# Altium PCB SerialBoard (complex).PcbDoc
Units mil, origin at the board's own origin, x right, y up, seen from the top; angles counter-clockwise.
Board outline 2500 x 1750 mil, 2 copper layers (Top Layer, Bottom Layer); 37 components, 48 nets, 225 pads, 36 vias.
Unrouted connection lines stored in the file: 39.
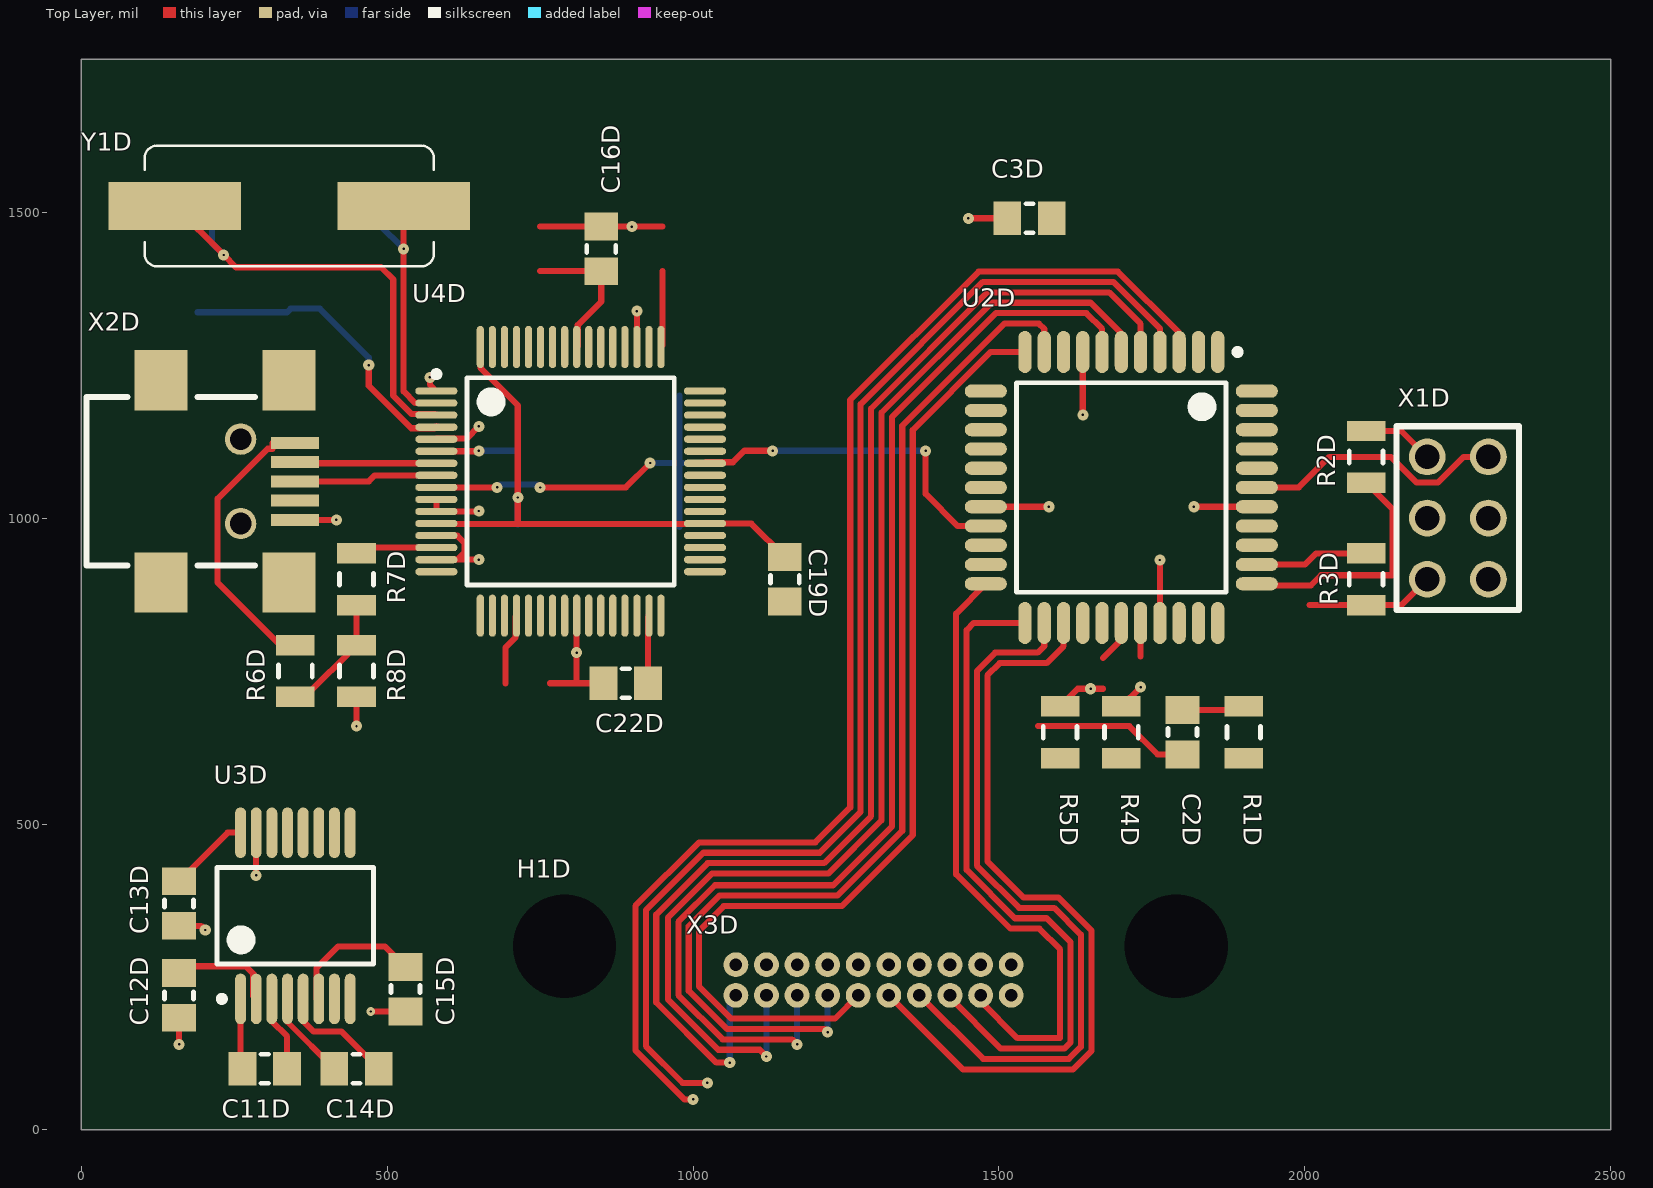
[diagram p0: Top Layer view]
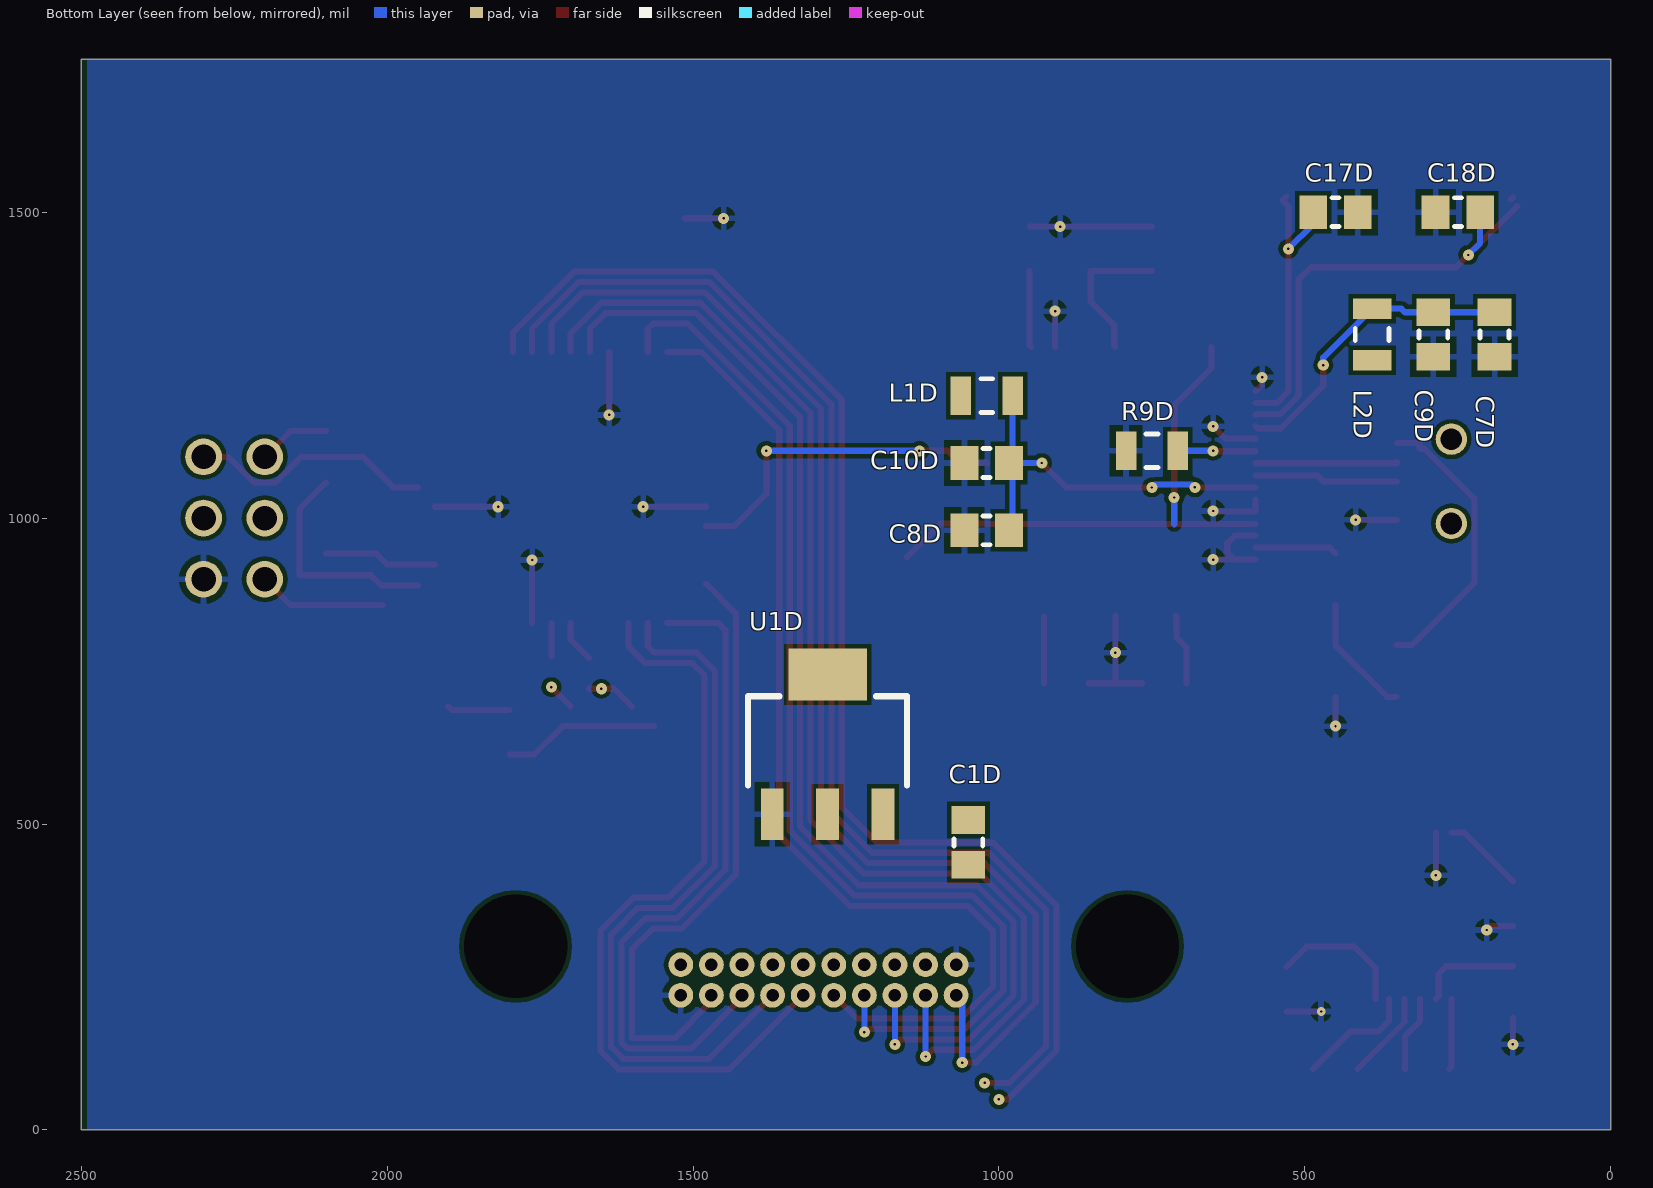
[diagram p1: Bottom Layer view, seen from below]

## Layer stack, top to bottom
Top Solder: solder mask 0.4, Solder Resist, Dk 3.5
Top Layer: signal copper 1.4
Dielectric 1: dielectric 12.6, FR-4, Dk 4.8
Bottom Layer: signal copper 1.4
Bottom Solder: solder mask 0.4, Solder Resist, Dk 3.5

## Board outline
0,0 2500,0 2500,1750 0,1750

## Design rules (kind name [scope] priority, off if disabled: settings)
Clearance [All] p1: gap=7
PolygonConnect [All] p1: connectstyle=Relief reliefconductorwidth=10 reliefentries=4 polygonreliefangle="90 Angle" airgapwidth=10
RoomDefinition "ATXMega32 Master" [InComponentClass('ATXMega32 Master')] p1 off: confinementstyle=ConfineIn formatcopy=TRUE lockcomponents=FALSE outline 1250,580 2460,580 2460,1620 1250,1620
RoomDefinition "USB to Serial" [InComponentClass('USB to Serial')] p2 off: confinementstyle=ConfineIn formatcopy=TRUE lockcomponents=FALSE outline 0,-250 2250,-250 2250,1750 0,1750
RoutingVias [All] p1: holewidth=28 width=50 viastyle="Through Hole" minholewidth=4 minwidth=18 maxholewidth=28 maxwidth=50
SolderMaskExpansion [All] p1: expansion=4
Width [All] p1: maxlimit=10 minlimit=10 preferedwidth=10
30 further rules are at their usual default settings.

## Classes and differential pairs
component class "Serial Board Overview": C1D U1D
component class "ATXMega32 Master": C2D C3D C20 C21 C22 C23 C24 R1D R2D R3D R4D R5 R5D R6 R7 R8 R9 U2D X1D X3

## Components (designator, comment, footprint, x,y, rotation, side; value= is the part's Value field where it differs from the comment)
C1D ".1uF" C0805 1050,470 r270 bottom
C2D "Cap" C0805 1800,650 r90 top
C3D "Cap" C0805 1550,1490 r180 top
C7D "Cap" C0805 190,1300 r270 bottom
C8D "Cap" C0805 1020,980 r0 bottom
C9D "Cap" C0805 290,1300 r270 bottom
C10D "Cap" C0805 1020,1090 r0 bottom
C11D "Cap" C0805 300,100 r0 top
C12D "Cap" C0805 160,220 r270 top
C13D "Cap" C0805 160,370 r270 top
C14D "Cap" C0805 450,100 r0 top
C15D "Cap" C0805 530,230 r270 top
C16D "Cap" C0805 850,1440 r90 top
C17D "Cap" C0805 450,1500 r180 bottom
C18D "Cap" C0805 250,1500 r0 bottom
C19D "Cap" C0805 1150,900 r270 top
C22D "Cap" C0805 890,730 r180 top
H1D "Holes - x inch" "Holes - 1.0 Inch" 1790,300 r180 top
L1D "Inductor" R0805 1020,1200 r0 bottom
L2D "Inductor" R0805 390,1300 r270 bottom
R1D "Resistor" R0805 1900,650 r270 top
R2D "Resistor" R0805 2100,1100 r90 top
R3D "Resistor" R0805 2100,900 r270 top
R4D "Resistor" R0805 1700,650 r270 top
R5D "Resistor" R0805 1600,650 r270 top
R6D "Resistor" R0805 350,750 r90 top
R7D "Resistor" R0805 450,900 r90 top
R8D "Resistor" R0805 450,750 r90 top
R9D "Resistor" R0805 750,1110 r0 bottom
U1D "AP1117E33G-13" AP1117 1280,630 r180 bottom
U2D "ATxmegaA4" ATxmegaA4-TQFP44 1700,1050 r270 top
U3D "SP3232E" SP3232E-SSOP16 350,350 r90 top
U4D "FT4232H" FT4232H-LQFP64 800,1060 r0 top
X1D "Header" "2X3 HEADER" 2250,1000 r270 top
X2D "USB Mini Jack" UX60-MB-5ST 240,1060 r270 top
X3D "M50-4301045" M50-4301045 1520,220 r180 top
Y1D "9C-12.000MAAJ" 9C-12.000MAAJ-HC49 340,1510 r0 top

## Footprints (in the part's own frame and the unit in brackets; to place one, negate y for a bottom-side part, rotate by r counter-clockwise, add the part's x,y. Pads: shape width x height; smd on the part's side, far side on the other; paste and mask are expansions set on the pad)
"2X3 HEADER" [mil]
  round 60 hole 40: 1(-100,-50) 2(-100,50) 3(0,-50) 4(0,50) 5(100,-50) 6(100,50)
  silkscreen extent -150,-100 150,100, body extent -150,-100 150,100, height 374
9C-12.000MAAJ-HC49 [mm] "12 Mhz Crystal"
  rect 5.5x2 smd: 1(-4.75,0) 2(4.75,0)
  silkscreen extent -6,-2.5 6,2.5, body extent -6.27,-2.32 6.43,2.38, height 4.16
AP1117 [mm] "SOT223-3L"
  rect 0.95x2.15 smd: GND(-2.3,-2.9) VIN(2.3,-2.9) VOUT(0,-2.9)
  rect 3.25x2.15 smd: VOUT(0,2.9)
  silkscreen extent -3.3,-1.7 3.3,2, body extent -3.25,-3.47 3.25,3.47, height 1.6
ATxmegaA4-TQFP44 [mm] "TQFP, 44-Leads, Body 12.3x12.3mm (max), Pitch 0.80mm, IPC Medium Density"
  oval 1.75x0.55 smd: 1(-5.625,4) 2(-5.625,3.2) 3(-5.625,2.4) 4(-5.625,1.6) 5(-5.625,0.8) 6(-5.625,0) 7(-5.625,-0.8) 8(-5.625,-1.6) 9(-5.625,-2.4) 10(-5.625,-3.2) 11(-5.625,-4) 23(5.625,-4) 24(5.625,-3.2) 25(5.625,-2.4) 26(5.625,-1.6) 27(5.625,-0.8) 28(5.625,0) 29(5.625,0.8) 30(5.625,1.6) 31(5.625,2.4) 32(5.625,3.2) 33(5.625,4)
  oval 0.55x1.75 smd: 12(-4,-5.625) 13(-3.2,-5.625) 14(-2.4,-5.625) 15(-1.6,-5.625) 16(-0.8,-5.625) 17(0,-5.625) 18(0.8,-5.625) 19(1.6,-5.625) 20(2.4,-5.625) 21(3.2,-5.625) 22(4,-5.625) 34(4,5.625) 35(3.2,5.625) 36(2.4,5.625) 37(1.6,5.625) 38(0.8,5.625) 39(0,5.625) 40(-0.8,5.625) 41(-1.6,5.625) 42(-2.4,5.625) 43(-3.2,5.625) 44(-4,5.625)
  silkscreen extent -5.75,-4.35 4.35,4.95, body extent -5,-5 5,5, height 1.2
C0805 [mm] "Chip Capacitor, 2-Leads, Body 2.0x1.3mm, IPC Medium Density"
  rect 1.15x1.4 smd: 1(-0.925,0) 2(0.925,0)
  silkscreen extent -0.15,-0.6 0.15,0.6, body extent -1,-0.63 1,0.63, height 0.6
FT4232H-LQFP64 [mm] "TSQFP, 64-Leads, Body 12.2x12.2mm (max), Pitch 0.50mm, IPC Medium Density"
  oval 1.75x0.3 smd: 1(-5.575,3.75) 2(-5.575,3.25) 3(-5.575,2.75) 4(-5.575,2.25) 5(-5.575,1.75) 6(-5.575,1.25) 7(-5.575,0.75) 8(-5.575,0.25) 9(-5.575,-0.25) 10(-5.575,-0.75) 11(-5.575,-1.25) 12(-5.575,-1.75) 13(-5.575,-2.25) 14(-5.575,-2.75) 15(-5.575,-3.25) 16(-5.575,-3.75) 33(5.575,-3.75) 34(5.575,-3.25) 35(5.575,-2.75) 36(5.575,-2.25) 37(5.575,-1.75) 38(5.575,-1.25) 39(5.575,-0.75) 40(5.575,-0.25) 41(5.575,0.25) 42(5.575,0.75) 43(5.575,1.25) 44(5.575,1.75) 45(5.575,2.25) 46(5.575,2.75) 47(5.575,3.25) 48(5.575,3.75)
  oval 0.3x1.75 smd: 17(-3.75,-5.575) 18(-3.25,-5.575) 19(-2.75,-5.575) 20(-2.25,-5.575) 21(-1.75,-5.575) 22(-1.25,-5.575) 23(-0.75,-5.575) 24(-0.25,-5.575) 25(0.25,-5.575) 26(0.75,-5.575) 27(1.25,-5.575) 28(1.75,-5.575) 29(2.25,-5.575) 30(2.75,-5.575) 31(3.25,-5.575) 32(3.75,-5.575) 49(3.75,5.575) 50(3.25,5.575) 51(2.75,5.575) 52(2.25,5.575) 53(1.75,5.575) 54(1.25,5.575) 55(0.75,5.575) 56(0.25,5.575) 57(-0.25,5.575) 58(-0.75,5.575) 59(-1.25,5.575) 60(-1.75,5.575) 61(-2.25,5.575) 62(-2.75,5.575) 63(-3.25,5.575) 64(-3.75,5.575)
  silkscreen extent -5.7,-4.3 4.3,4.57, body extent -5,-5 5,5, height 1.6
"Holes - 1.0 Inch" [mil]
  round 0 hole 169: 0(0,0) 0(1000,0)
M50-4301045 [mil] "Archer Connector - Right angle shrouded connector for Modular boards 2x10"
  round 40.59 hole 20.59: 1(0,0) 2(0,-50) 3(50,0) 4(50,-50) 5(100,0) 6(100,-50) 7(150,0) 8(150,-50) 9(200,0) 10(200,-50) 11(250,0) 12(250,-50) 13(300,0) 14(300,-50) 15(350,0) 16(350,-50) 17(400,0) 18(400,-50) 19(450,0) 20(450,-50)
  body extent -88,-58 538,244, height 226
R0805 [mm] "Chip Resistor, 2-Leads, Body 2.0x1.5mm, IPC Medium Density"
  rect 0.85x1.6 smd: 1(-1.075,0) 2(1.075,0)
  silkscreen extent -0.25,-0.7 0.25,0.7, body extent -1,-0.75 1,0.75, height 0.55
SP3232E-SSOP16 [mm] "SOP, 16-Leads, Body 6.5x5.6mm (max), Pitch 0.65mm, IPC Medium Density"
  oval 2.1x0.45 smd: 1(-3.45,2.275) 2(-3.45,1.625) 3(-3.45,0.975) 4(-3.45,0.325) 5(-3.45,-0.325) 6(-3.45,-0.975) 7(-3.45,-1.625) 8(-3.45,-2.275) 9(3.45,-2.275) 10(3.45,-1.625) 11(3.45,-0.975) 12(3.45,-0.325) 13(3.45,0.325) 14(3.45,0.975) 15(3.45,1.625) 16(3.45,2.275)
  silkscreen extent -3.57,-3.25 2,3.25, body extent -2.8,-3.25 2.8,3.25, height 2
UX60-MB-5ST [mm] "USB, mini B, right angle, surface mount"
  rect 0.5x2 smd: 1(-1.6,2.775) 2(-0.8,2.775) 3(0,2.775) 4(0.8,2.775) 5(1.6,2.775)
  rect 2.5x2.2 smd: M1(-4.2,-2.775) M2(4.2,-2.775) M3(4.2,2.525) M4(-4.2,2.525)
  round 1.3 hole 0.9: M5(-1.75,0.525) M6(1.75,0.525)
  silkscreen extent -3.5,-5.87 3.5,1.13, body extent -5,-5.5 5,3.4, height 3.95

## Part data
C1D: library part Cap, "Unpolarized Capacitor"
C2D C3D C7D C8D C9D C10D C11D C12D C13D C14D C15D C16D C17D C18D C19D C22D: "Unpolarized Capacitor"
R1D R2D R3D R4D R5D R6D R7D R8D R9D: library part Res
U1D: "3.3V 1A Linear Regulator"
U3D: "RS232 Transceiver"
U4D: "FTDI USB Quad UART"
X1D: library part "2x3 Header", "2x3 Header"
X2D: library part USB-MINI, "USB Mini connector"
Y1D: "12Mhz Crystal Oscillator"

## Via types
v1: diameter 18, hole 4, Top Layer to Bottom Layer, 35 vias
v2: diameter 14, hole 4, Top Layer to Bottom Layer, 1 vias

## Nets (pads, with @x,y where several pads share a name; then routed paths per layer and width w, separated by ;. In a path a pad name is that pad's centre, name@x,y a point inside that pad or via, vN(x,y) a via of type N, cw(c..) or ccw(c..) an arc to the next point about the centre after c; other vN are vias at no path point)
1V8: C19D.1 U4D.12 U4D.37 U4D.49 U4D.64 | length 1077
  Top Layer w10: U4D.12 581.04,990.57 710,990.57 ; U4D.64 652.36,1245.31 713.58,1184.09 v1(713.58,1033.58) 713.58,994.16 710,990.57 ; U4D.49 950,1281.85 950,1403.58 ; C19D.1 1095.31,991.1 U4D.37 1018.96,990.57 710,990.57
  Bottom Layer w10: 713.58,990 v1(713.58,1033.58)
3V3: C1D.1 C3D.1 C13D.1 C16D.2 C22D.1 L1D.2 L2D.2 R1D.2 R4D.2 R5D.2 U1D.VOUT U2D.9 U2D.19 U2D.31 U2D.39 U3D.16 U4D.20 U4D.31 U4D.42 U4D.50 U4D.56 X1D.2 | length 1566.2
  Top Layer w10: C13D.1 239.41,485.83 U3D.16 ; 693.58,730 693.58,788.5 709.64,804.55 709.64,838.73 U4D.20 ; 750,1403.58 850,1403.58 850,1353.83 811.62,1315.45 811.62,1281.27 U4D.56 ; C22D.1 U4D.31@926.42,838.98 ; U4D.42 1021.27,1091.31 1065.23,1091.31 1083.93,1110 v1(1130,1110) ; v1(1380,1110) 1380,1039.55 1432.54,987.01 U2D.19 ; U2D.39@1950,1050 1990,1050 2040,1100 2140.6,1100 2182.6,1058 2217.4,1058 2259.4,1100 X1D.2
  Bottom Layer w10: v1(1130,1110) v1(1380,1110)
5V: U1D.VIN X3D.6
GND: C3D.2 C7D.2 C8D.2 C9D.2 C10D.2 C12D.2 C13D.2 C15D.2 C16D.1 C17D.2 C18D.2 C19D.2 C22D.2 R8D.1 R9D.2 U1D.GND U2D.8 U2D.18 U2D.30 U2D.38 U3D.15 U4D.1 U4D.5 U4D.10 U4D.11 U4D.13 U4D.15 U4D.25 U4D.35 U4D.47 U4D.51 X1D.6 X2D.5 X3D.1 X3D.20 | length 1645.6
  Top Layer w10: v1(160,140) C12D.2 ; C13D.2 195.98,333.58 v1(202.77,326.79) ; v1(286.02,416.02) U3D.15 ; X2D.5 v1(417.01,997.01) ; v1(450,660) R8D.1 ; v2(473.58,193.58) C15D.2 ; v1(570,1230) 570,1218.15 U4D.1 ; U4D.13 614.69,971.42 626.96,959.15 626.96,944.32 614.69,932.05 U4D.15 v1(650,932.05) ; U4D.10 U4D.11 v1@650.79,1010.79 ; U4D.5 580.51,1129.8 629.8,1129.8 v1(650,1150) ; 750,1476.42 850,1476.42 950,1476.42 ; 766.42,730 810,730 ; U4D.25 809.84,730.16 810,730 ; C22D.2 810,730 ; U4D.51 v1(908.27,1338.27) ; v1(1450,1490) C3D.2 ; U2D.18 v1(1581.5,1018.5) ; v1(1637.01,1168.5) U2D.8 ; U2D.30 v1(1762.99,931.5) ; v1(1818.5,1018.5) U2D.38
  other v1: 809.84,780 650,1011.57 900,1476.42
NetC2D_1: C2D.1 U4D.21 | length 255.6
  Top Layer w10: 1563.59,660 1712.88,660 1759.29,613.58 C2D.1
NetC2D_2: C2D.2 R1D.1 R3D.1 U2D.35 | length 288.6
  Top Layer w10: C2D.2 1894.09,686.42 R1D.1 ; U2D.35 1999.97,924.02 2018.28,942.32 R3D.1
NetC7D_1: C7D.1 C9D.1 L2D.1 U4D.4 | length 502.4
  Top Layer w10: v1(470,1250) 470,1216.2 539.4,1146.8 576.95,1146.8 U4D.4@580.51,1150.36
  Bottom Layer w10: C7D.1 C9D.1 336.42,1336.42 342.32,1342.32 L2D.1 470,1262.32 v1(470,1250)
NetC8D_1: C8D.1 C10D.1 L1D.1 U4D.9 | length 637.5
  Top Layer w10: U4D.9 v1(679.84,1050.16) ; v1(750,1050) 890,1050 v1(930,1090)
  Bottom Layer w10: v1(679.84,1050.16) 684.27,1054.58 745.42,1054.58 v1(750,1050) ; v1(930,1090) C10D.1@977.68,1090 ; C8D.1@977.68,985.91 C10D.1@977.68,1090 ; L1D.1 C10D.1@977.68,1090 ; C10D.1 C10D.1@977.68,1090
NetC11D_1: C11D.1 U3D.1 | length 115.5
  Top Layer w10: U3D.1 260.43,103.15 C11D.1
NetC11D_2: C11D.2 U3D.3 | length 124.4
  Top Layer w10: U3D.3 311.61,177.79 336.42,152.98 C11D.2
NetC12D_1: C12D.1 U3D.2 | length 169.4
  Top Layer w10: C12D.1@160,267.51 269.07,267.51 281.29,255.29 281.29,218.91 U3D.2
NetC14D_1: C14D.1 U3D.4 | length 145.8
  Top Layer w10: U3D.4 337.2,176.38 C14D.1
NetC14D_2: C14D.2 U3D.5 | length 192.2
  Top Layer w10: U3D.5 362.8,177.79 379.75,160.83 425.58,160.83 C14D.2
NetC15D_1: C15D.1 U3D.6 | length 224.4
  Top Layer w10: U3D.6@384.53,214.17 384.53,264.53 420,300 496.42,300 C15D.1
NetC17D_1: C17D.1 U4D.2 Y1D.2 | length 463.4
  Top Layer w10: Y1D.2@530,1525.83 536.42,1519.41 Y1D.2 v1(527.01,1440) 527.01,1207.28 546.33,1187.95 U4D.2
  Bottom Layer w10: C17D.1 486.42,1480.59 v1(527.01,1440)
NetC18D_1: C18D.1 U4D.3 Y1D.1 | length 763.3
  Top Layer w10: Y1D.1 v1(232.99,1430) 252.99,1410 490,1410 510.01,1389.99 510.01,1200.23 540.2,1170.05 578.73,1170.05 U4D.3 ; Y1D.1@160,1524.17 Y1D.1@163.58,1520.59
  Bottom Layer w10: C18D.1 213.58,1449.41 v1(232.99,1430)
NetR2D_1: R2D.1 U2D.34 | length 369.5
  Top Layer w10: U2D.34@1950,890 2010,890 2026.5,906.5 2143.5,906.5 2143.5,1014.18 R2D.1
NetR2D_2: R2D.2 X1D.1 | length 117.5
  Top Layer w10: R2D.2 2157.68,1142.32 X1D.1
NetR3D_2: R3D.2 X1D.5 | length 209.9
  Top Layer w10: 2007.68,857.68 R3D.2 2157.68,857.68 X1D.5
NetR6D_1: R6D.1 R7D.1 R8D.2 | length 200.4
  Top Layer w10: R6D.1 365.35,707.68 R8D.2 R7D.1
NetR6D_2: R6D.2 X2D.1 | length 476
  Top Layer w10: X2D.1 312.99,1122.99 312.99,1113.34 304.91,1113.34 223.08,1031.51 223.08,894.46 325.21,792.32 R6D.2
NetR7D_2: R7D.2 U4D.14 | length 134.4
  Top Layer w10: R7D.2 459.41,951.73 U4D.14
NetR9D_1: R9D.1 U4D.6 | length 128
  Top Layer w10: U4D.6 v1@650.79,1109.21
  Bottom Layer w10: v1(650,1110) R9D.1
NetU2D_3: U2D.3 X3D.18 | length 2144.3
  Top Layer w10: v1(1000,50) 985.75,50 905.91,129.84 905.91,366.07 1009.84,470 1200,470 1257,527 1257,1193.17 1466.74,1402.91 1694.13,1402.91 1794.49,1302.55 U2D.3
NetU2D_4: U2D.4 X3D.16 | length 2073.1
  Top Layer w10: v1(1023.42,77) 982.79,77 922.91,136.88 922.91,359.02 1016.88,453 1207.04,453 1274,519.96 1274,1186.12 1473.78,1385.91 1687.09,1385.91 1762.99,1310.01 U2D.4
NetU2D_5: U2D.5 X3D.19 | length 2089
  Top Layer w10: v1(1060,110) 1038.16,110 939.91,208.25 939.91,351.98 1023.93,436 1214.08,436 1291,512.92 1291,1179.08 1480.82,1368.91 1680.05,1368.91 1731.5,1317.46 U2D.5
  Bottom Layer w10: v1(1060,110) 1060,210 X3D.19
NetU2D_6: U2D.6 X3D.17 | length 2032
  Top Layer w10: v1(1120,120) 1109,131 1041.2,131 959,213.2 959,347.03 1030.97,419 1221.12,419 1308,505.88 1308,1172.04 1487.86,1351.91 1649.88,1351.91 1700,1301.78 U2D.6
  Bottom Layer w10: v1(1120,120) X3D.17
NetU2D_7: U2D.7 X3D.15 | length 1972
  Top Layer w10: v1(1170,140) 1162,148 1048.24,148 976,220.24 976,339.99 1035.92,399.91 1229.03,399.91 1325,495.88 1325,1165 1494.91,1334.91 1642.83,1334.91 1668.5,1309.24 U2D.7
  Bottom Layer w10: v1(1170,140) X3D.15
NetU2D_10: U2D.10 X3D.13 | length 1838.7
  Top Layer w10: v1(1220,160) 1215,165 1055.29,165 993,227.29 993,332.95 1042.96,382.91 1236.07,382.91 1342,488.83 1342,1150.88 1509.02,1317.91 1565.35,1317.91 1574.02,1309.24 U2D.10
  Bottom Layer w10: v1(1220,160) X3D.13
NetU2D_11: U2D.11 X3D.11 | length 1701
  Top Layer w10: X3D.11 1232,182 1062.33,182 1010,234.33 1010,325.91 1050,365.91 1243.12,365.91 1359,481.79 1359,1143.84 1486.62,1271.46 U2D.11
NetU2D_16: U2D.16 U4D.26
NetU2D_17: U2D.17 U4D.27
NetU2D_22: U2D.22 X3D.3 | length 1025.5
  Top Layer w10: X3D.3 1470,210 1530,150 1600,150 1600,294.96 1565.96,329 1518.88,329 1430,417.88 1430,843.98 U2D.22
NetU2D_23: U2D.23 X3D.5 | length 1114.8
  Top Layer w10: X3D.5 1420,215.96 1502.96,133 1607.04,133 1617,142.96 1617,306.98 1577.98,346 1525.92,346 1447,424.92 1447,817.04 1458.5,828.54 U2D.23
NetU2D_24: U2D.24 X3D.7 | length 1197.9
  Top Layer w10: X3D.7 1474,116 1614.08,116 1634,135.92 1634,319 1590,363 1532.96,363 1464,431.96 1464,750 1494,780 1563.25,780 1574.02,790.76 U2D.24
NetU2D_25: U2D.25 X3D.9 | length 1293.5
  Top Layer w10: X3D.9 1441,99 1621.12,99 1651,128.88 1651,326.04 1597.04,380 1540,380 1481,439 1481,742.96 1501.04,763 1577.75,763 1605.51,790.76 U2D.25
NetU3D_11: U3D.11 U4D.16
NetU3D_12: U3D.12 U4D.17
NetU4D_7: U4D.7 X2D.2 | length 233.2
  Top Layer w10: X2D.2 349.25,1089.53 U4D.7
NetU4D_8: U4D.8 X2D.3 | length 235.3
  Top Layer w10: X2D.3 470,1060 479.84,1069.84 U4D.8
SCL: R4D.1 U2D.29 X3D.2 | length 99.3
  Top Layer w10: R4D.1 v1(1731.5,723.82) ; 1731.5,773.82 U2D.29
SDA: R5D.1 U2D.28 X3D.4 | length 151.8
  Top Layer w10: R5D.1 1628.73,721.06 1670,721.06 ; 1670,771.06 1700,801.06 U2D.28
  other v1: 1650,721.06
UART3_RX: U4D.52 X3D.14
UART3_TX: U4D.48 X3D.12
UART->ACOUSTICS: U4D.38 X3D.8
UART<-ACOUSTICS: U4D.39 X3D.10
UART_RX1: U3D.13
UART_TX1: U3D.14
pads on no net: C1D.2 H1D.0 U2D.1 U2D.2 U2D.12 U2D.13 U2D.14 U2D.15 U2D.20 U2D.21 U2D.26 U2D.27 U2D.32 U2D.33 U2D.36 U2D.37 U2D.40 U2D.41 U2D.42 U2D.43 U2D.44 U3D.7 U3D.8 U3D.9 U3D.10 U4D.18 U4D.19 U4D.22 U4D.23 U4D.24 U4D.28 U4D.29 U4D.30 U4D.32 U4D.33 U4D.34 U4D.36 U4D.40 U4D.41 U4D.43 U4D.44 U4D.45 U4D.46 U4D.53 U4D.54 U4D.55 U4D.57 U4D.58 U4D.59 U4D.60 U4D.61 U4D.62 U4D.63 X1D.3 X1D.4 X2D.4 X2D.M1 X2D.M2 X2D.M3 X2D.M4 X2D.M5 X2D.M6

## Polygon pours and split planes (outlines as drawn)
GND on Bottom Layer "Bottom Layer-No Net" (solid, pour order 0): 0,1750 0,0 2500,0 2490,0 2490,1750